# EAGLE board DuplexOptoIso (EAGLE 6.4)
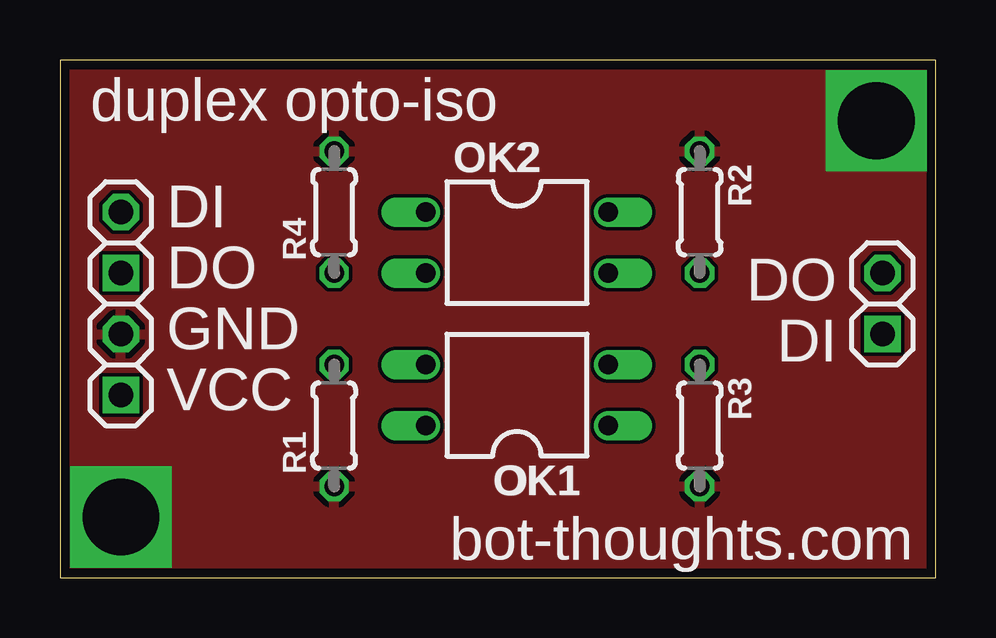
[diagram p0: board, top side]
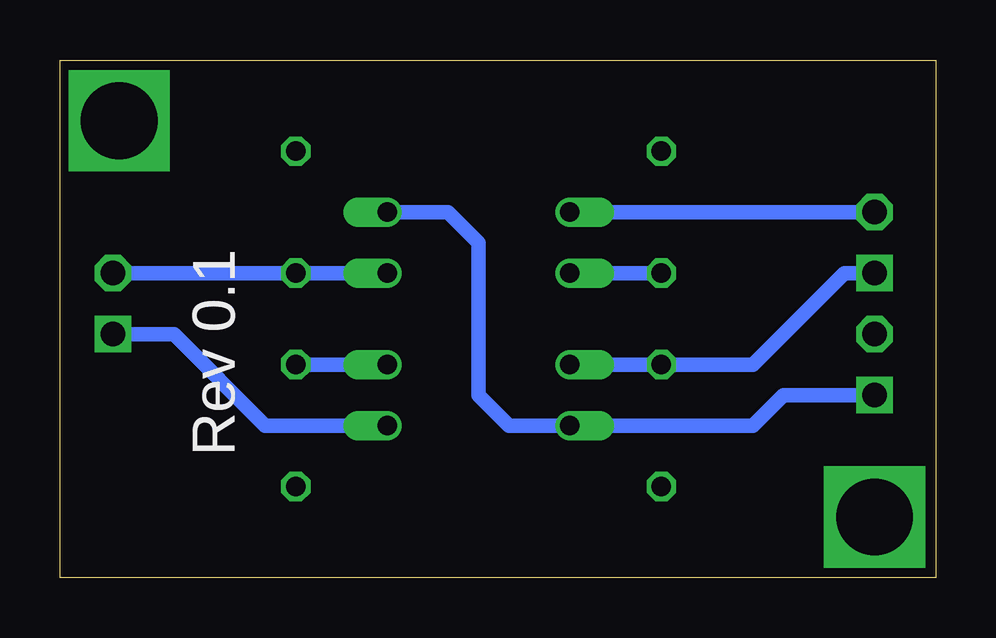
[diagram p1: board, bottom side, seen from below]

Size 36.5 x 21.58 mm. Coordinates in mm from the lower left corner, seen from the top.
Outline: 0,0 36.5,0 36.5,21.58 0,21.58 0,0
Copper layers (1*16): Top 0.0356mm / dielectric 1.5011mm / Bottom 0.0356mm
Design rules "LaenPCBOrder": minimum track width 6mil, minimum drill 13mil, track to track 6mil, track to pad 6mil, pad to pad 6mil, via to via 6mil, smd to smd 6mil, copper to edge 15mil, drill to drill 6mil, minimum pad ring 7mil, minimum via ring 7mil, stop-mask expansion 4mil, vias tented up to drill 20mil, thermal gap 10mil

## Footprints (pad centres in the part's own frame; a part is rotated, then mirrored left to right if it is on the bottom)
1X02-S = drill 1.016 square: 1 -1.27,0 | drill 1.016 octagon: 2 1.27,0
DIL04 = drill 0.813 offset: 1 -1.27,-3.81; 2 1.27,-3.81; 3 1.27,3.81; 4 -1.27,3.81
0204/5 = drill 0.813 octagon: 1 -2.54,0; 2 2.54,0

## Placement (x,y rotation side)
JP1  1IN2OUT  [1X02-S]  34.29,11.43 90 top
JP2  1OUT2IN  [1X02-S]  2.54,13.97 90 top
JP3  POWER  [1X02-S]  2.54,8.89 90 top
OK1  PC817  [DIL04]  19.05,7.62 90 top
OK2  PC817  [DIL04]  19.05,13.97 270 top
R1  [0204/5]  11.43,6.35 90 top
R2  [0204/5]  26.67,15.24 270 top
R3  [0204/5]  26.67,6.35 90 top
R4  [0204/5]  11.43,15.24 270 top

## Library data of the parts
JP1-JP3 = pinhead-2
OK1 OK2 = optocoupler; MPN: PC817X4J000F; OC_FARNELL: 9707727; OC_NEWARK: 97K7059
R1-R4 = rcl

## Nets
5V: JP3.1 OK1.4 OK2.4
GND: JP3.2 R1.1 R2.1 R3.1 R4.1
IN1: JP1.1 OK1.1
IN2: JP2.2 OK2.1
N$5: OK1.2 R3.2
N$6: OK2.2 R4.2
OUT1: JP2.1 OK1.3 R1.2
OUT2: JP1.2 OK2.3 R2.2

## Tracks (layer width: path | path; a pad name or v marks a point on that pad's centre or on a via)
5V
  Bottom 0.61: JP3.1 6.35,7.62 7.62,6.35 OK1.4 17.78,6.35 19.05,7.62 19.05,13.97 20.32,15.24 OK2.4
GND  (via drill 3.2)
  other vias: 2.54,2.54 34.04,19.05
  pour Top: 0,0 0,21.59 36.83,21.59 36.83,0
IN1
  Bottom 0.61: JP1.1 31.75,10.16 27.94,6.35 OK1.1
IN2
  Bottom 0.61: OK2.1 JP2.2
N$5
  Bottom 0.61: OK1.2 R3.2
N$6
  Bottom 0.61: OK2.2 R4.2
OUT1
  Bottom 0.61: OK1.3 R1.2 7.62,8.89 3.81,12.7 JP2.1
OUT2
  Bottom 0.61: OK2.3 R2.2 JP1.2

## Text on the board
tPlace: duplex opto-iso | DI | DO | DO | DI | GND | VCC | bot-thoughts.com
bPlace: Rev 0.1
tsilk: duplex opto-iso | OK2 | R2 | DI | R4 | DO | DO | DI | GND | R3 | VCC | OK1 | R1 | bot-thoughts.com
bsilk: Rev 0.1